# Allegro board ex2_rlc.brd
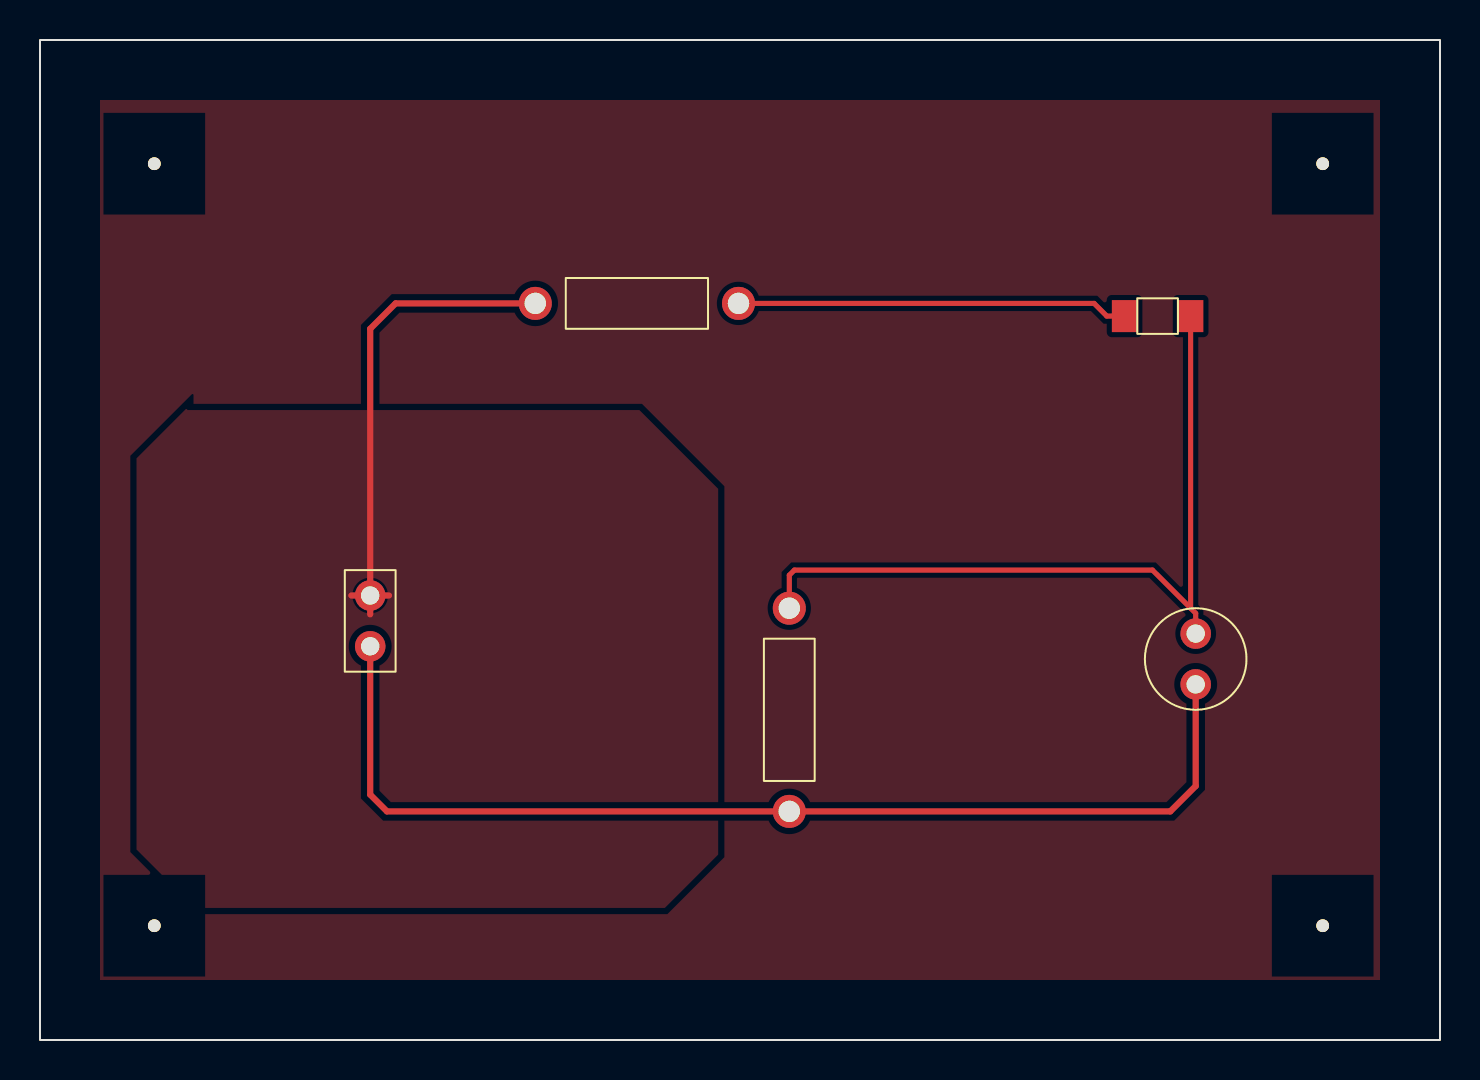
[diagram p0: board, top side]
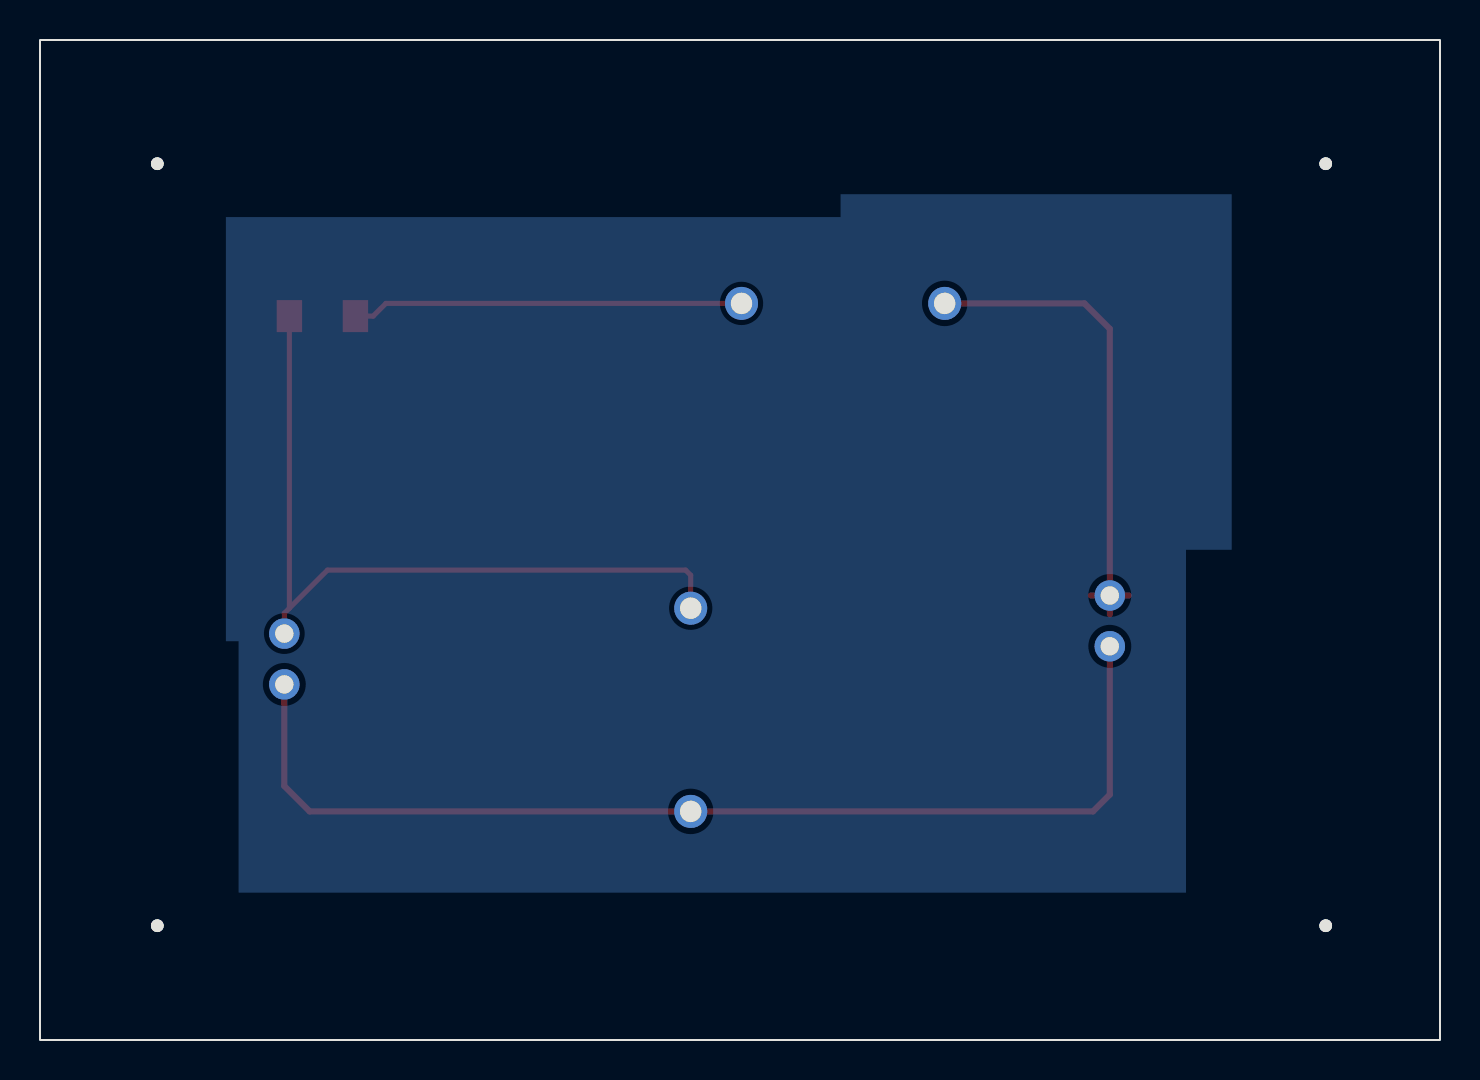
[diagram p1: board, bottom side, seen from below]

Outline 70 x 50 mm; copper layers: TOP, BOTTOM. Coordinates in mm from the lower left corner of the outline.
Outline path: rectangle 0,0 70,50

## Design rules (mm)
constraint set DEFAULT: min track width 0.254
net group BASENETS: nets KKK N00127
net group POWERNETS: nets GND

## Placement (name value [footprint] x y rotation side)
C1  1u  [CAP196]  57.78 17.78 0 top
J1  CON2  [JUMPER2]  16.51 19.68 90 top
L1  100n  [SMDRES]  55.88 36.2 0 top
NOREF  -  [unnamed]  5.71 43.81 0 top
NOREF#2  -  [unnamed]  64.14 5.71 0 top
NOREF#3  -  [unnamed]  64.14 43.81 0 top
NOREF#4  -  [unnamed]  5.71 5.71 0 top
R1  330  [RES400]  24.77 36.83 270 top
R2  330  [RES400]  37.47 21.59 180 top

## Library data of the parts
C1 = CAP NP: Tolerance: ***; User Part Number: ***
J1 = CON2: User Part Number: ***
L1 = INDUCTOR: Tolerance: ***; User Part Number: ***
R1 R2 = R: Tolerance: ***; User Part Number: ***

## Footprints (pads in the part's own frame, mm; a bottom-side part is the same pattern mirrored in y, then rotated)
CAP196
  round 1.524 hole 0.914: 1(0,0) 2(0,2.54)
JUMPER2
  round 1.524 hole 0.914: 1(0,0) 2(2.54,0)
RES400
  round 1.651 hole 1.067: 1(0,0) 2(0,10.16)
SMDRES
  rect 1.27x1.6 smd: 1(-1.651,0) 2(1.651,0)
unnamed
  round 0.635 hole 3.175 unplated: (0,0)

## Nets
GND: C1.1 J1.1 R2.2
VCC: J1.2 R1.1
KKK: L1.1 R1.2
N00127: C1.2 L1.2 R2.1

## Routing (per net, layer and track width the routed paths; a pad name or vN(x,y) marks a point on that pad's centre or on a via; arc(x,y) is an arc through that point)
GND: length 54.6
  TOP w0.308: C1.1 57.78,12.7 56.52,11.43 R2.2 17.35,11.43 16.51,12.27 J1.1
VCC: length 24.9
  TOP w0.308: R1.1 17.78,36.83 16.51,35.56 J1.2 ; 15.57,22.23 J1.2 ; J1.2 16.51,21.28 ; J1.2 17.45,22.23
KKK: length 19.6
  TOP w0.254: L1.1 53.34,36.2 52.7,36.83 R1.2
N00127: length 38.6
  TOP w0.254: L1.2 57.53,21.59 ; 57.53,21.59 57.78,21.34 C1.2 ; 57.53,21.59 55.63,23.5 37.72,23.5 37.47,23.24 R2.1

## Copper pours and planes (outline as drawn; the poured copper is in the pictures)
VCC on TOP: 7.37,31.5 29.97,31.5 33.91,27.56 33.91,9.27 31.24,6.6 7.75,6.6 4.83,9.53 4.83,29.08 7.37,31.62
Net_1 on TOP: 3,3 3,47 67,47 67,3
Net_4 on BOTTOM: 10.41,42.29 29.97,42.29 29.97,41.15 60.71,41.15 60.71,19.94 60.07,19.94 60.07,7.37 12.7,7.37 12.7,24.51 10.41,24.51

## Text on the board
TOLERANCE_TOP: FIGURE | FINISHED_SIZE | 0.914 | 1.067 | 3.175 | DRILL CHART: TOP to BOTTOM | ALL UNITS ARE IN MILLIMETERS | PLATED | NON-PLATED | QTY | 4
